# Altium PCB PCB1.PcbDoc
Units mil, origin at the board's own origin, x right, y up, seen from the top; angles counter-clockwise.
Board outline 6000 x 4000 mil, 2 copper layers (Top Layer, Bottom Layer); 69 components, 51 nets, 198 pads, 0 vias.
Unrouted connection lines stored in the file: 107.
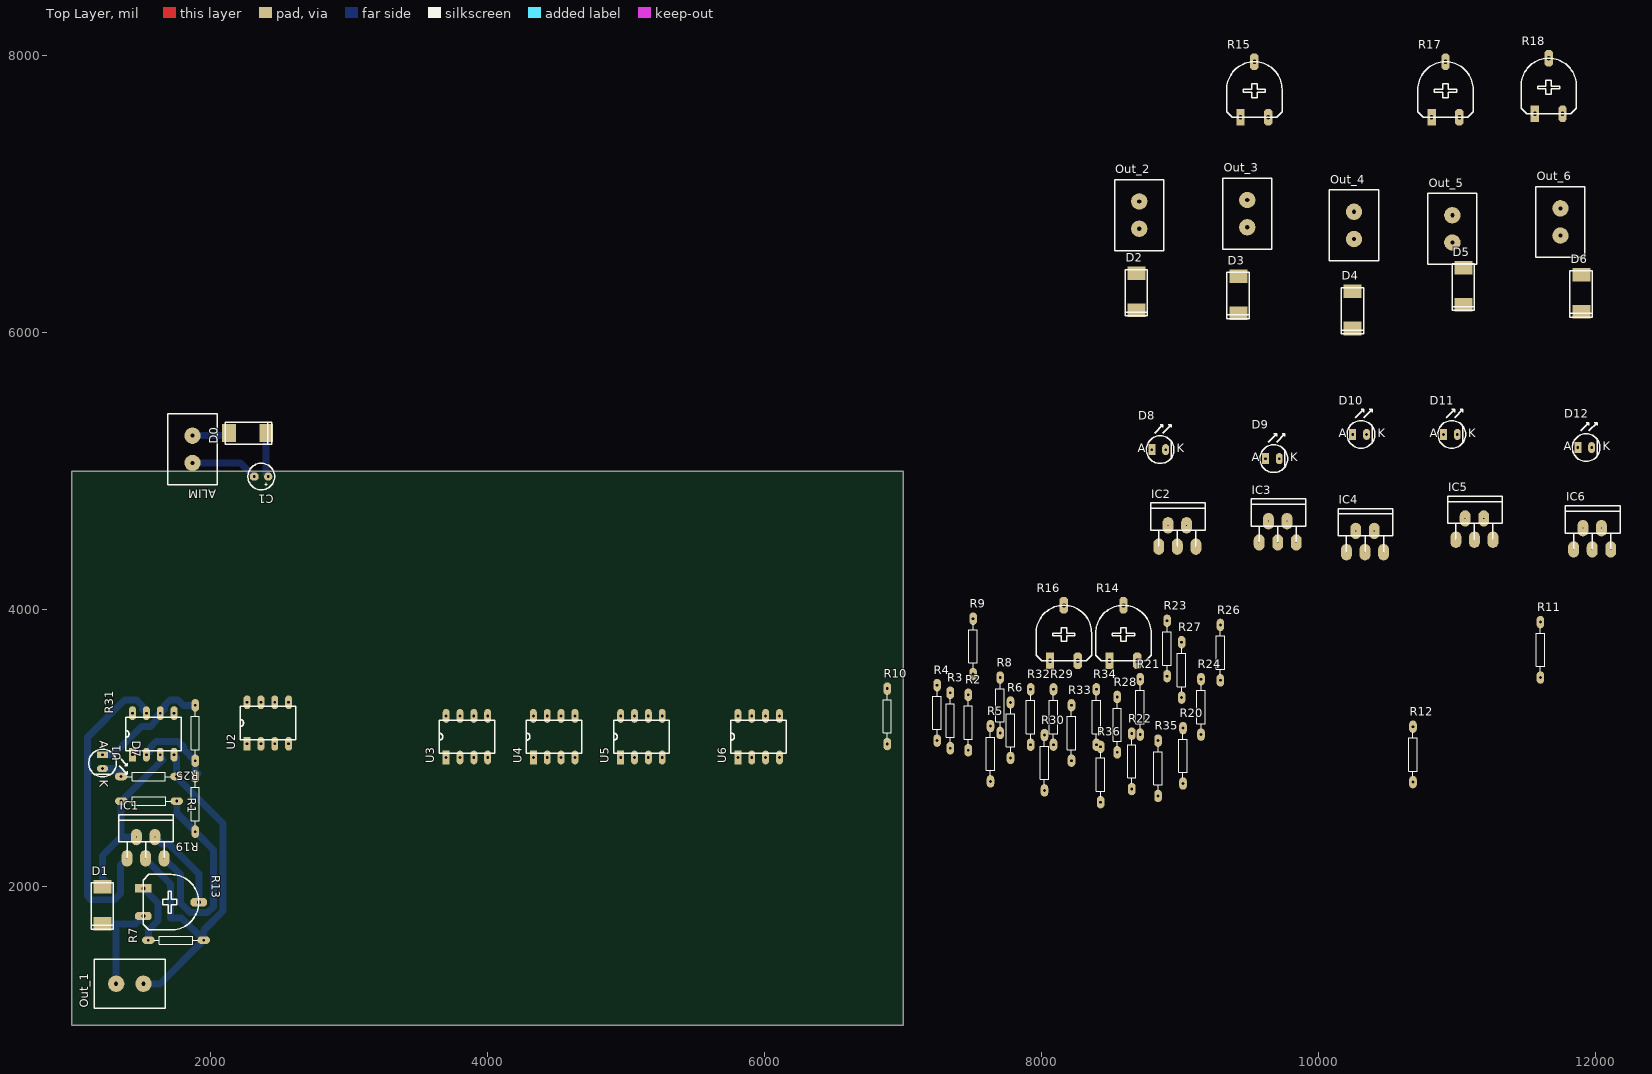
[diagram p0: Top Layer view]
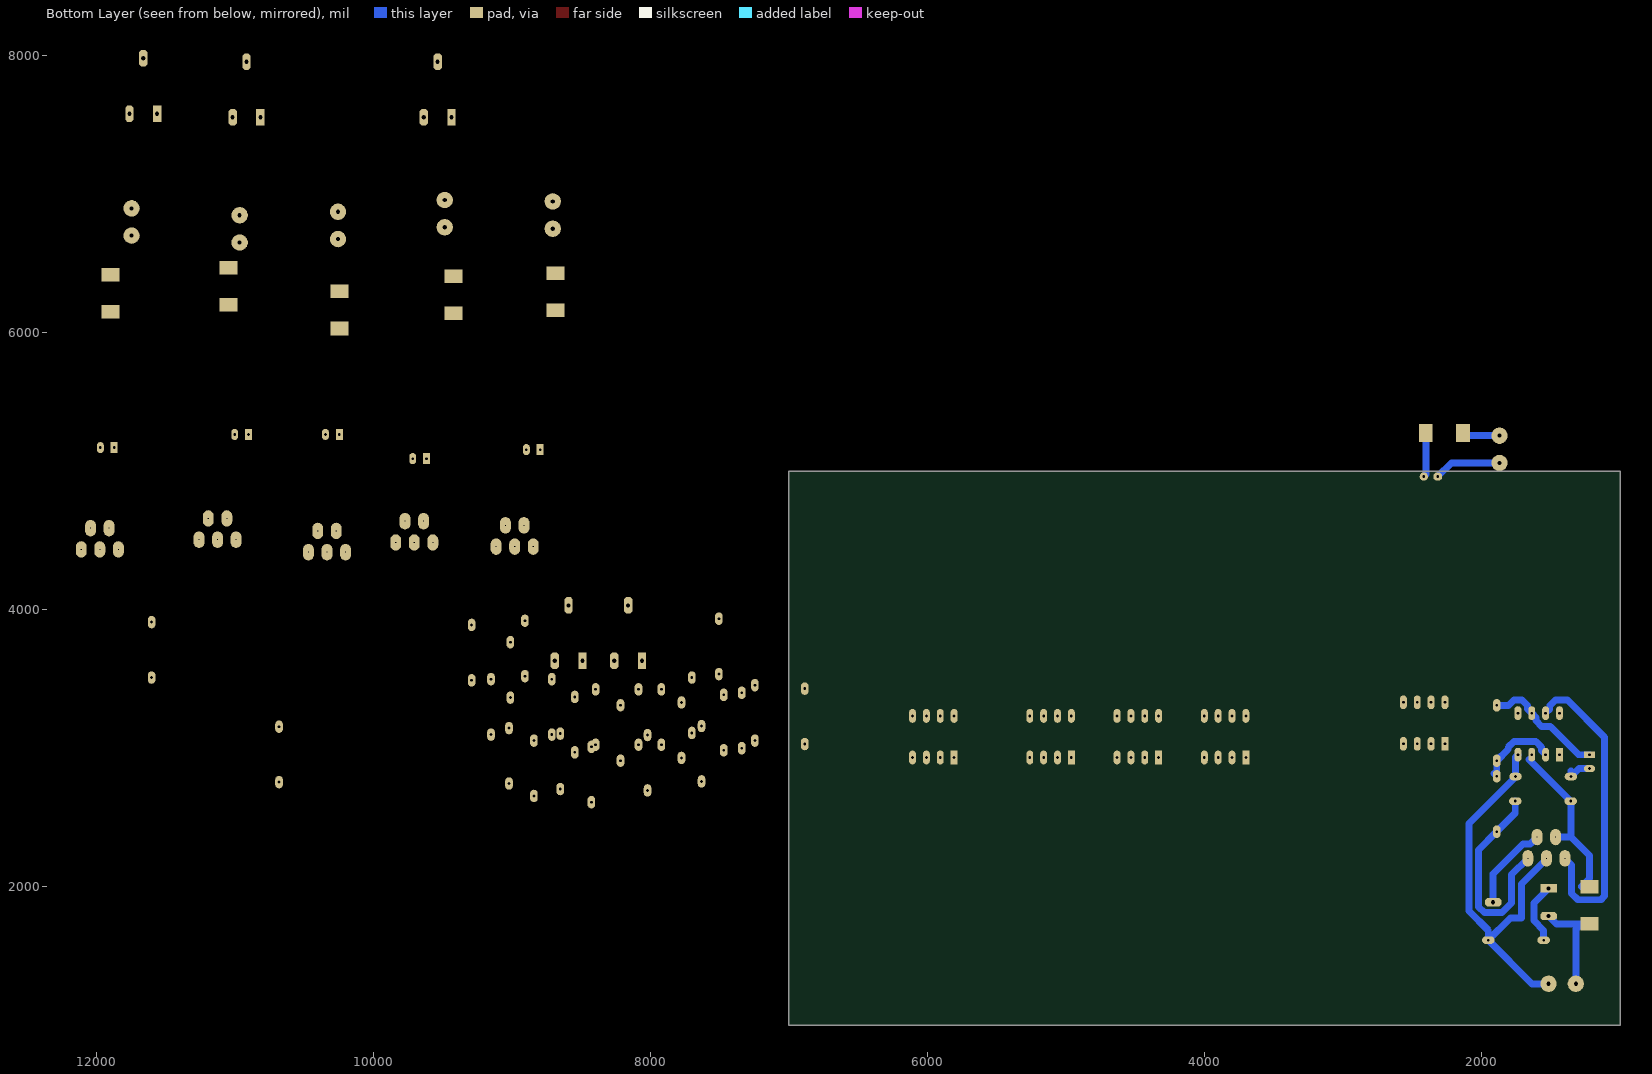
[diagram p1: Bottom Layer view, seen from below]

## Layer stack, top to bottom
Top Layer: signal copper 1.4
Dielectric: dielectric 12.6, FR-4, Dk 4.8
Bottom Layer: signal copper 1.4

## Board outline
1000,1000 7000,1000 7000,5000 1000,5000

## Design rules (kind name [scope] priority, off if disabled: settings)
Clearance [All] p1: gap=20
PolygonConnect [All] p1: connectstyle=Relief reliefconductorwidth=10 reliefentries=4 polygonreliefangle="90 Angle"
RoutingVias [All] p1: holewidth=28 width=50 viastyle="Through Hole" minholewidth=28 minwidth=50 maxholewidth=28 maxwidth=50
SilkscreenOverComponentPads [All] p1: minsilkscreentomaskgap=10
SolderMaskExpansion [All] p1: expansion=4
Width [All] p1: maxlimit=50 minlimit=50 preferedwidth=50
27 further rules are at their usual default settings.

## Components (designator, comment, footprint, x,y, rotation, side; value= is the part's Value field where it differs from the comment)
ALIM "Bornier" Bornier 1909.45,5255.91 r270 top
C1 "470uF" Capa_pol1 2421.26,4960.63 r180 top
D0 "Schottky B340" SMC 2401.57,5275.59 r180 top
D1 "Schottky B340" SMC 1220.47,1732.28 r90 top
D2 "Schottky B340" SMC 8685,6160 r90 top
D3 "Schottky B340" SMC 9420,6140 r90 top
D4 "Schottky B340" SMC 10245,6030 r90 top
D5 "Schottky B340" SMC 11045,6200 r90 top
D6 "Schottky B340" SMC 11895,6150 r90 top
D7 "Led" LED 1220.47,2952.76 r270 top
D8 "Led" LED 8795,5155 r0 top
D9 "Led" LED 9615,5090 r0 top
D10 "Led" LED 10245,5265 r0 top
D11 "Led" LED 10900,5265 r0 top
D12 "Led" LED 11870,5170 r0 top
IC1 "L200" Pentawatt 1397.64,2204.72 r0 top
IC2 "L200" Pentawatt 8845,4455 r0 top
IC3 "L200" Pentawatt 9570,4485 r0 top
IC4 "L200" Pentawatt 10200,4415 r0 top
IC5 "L200" Pentawatt 10990,4505 r0 top
IC6 "L200" Pentawatt 11840,4435 r0 top
Out_1 "Bornier" Bornier 1515.75,1259.84 r180 top
Out_2 "Bornier" Bornier 8665,6750 r90 top
Out_3 "Bornier" Bornier 9445,6760 r90 top
Out_4 "Bornier" Bornier 10215,6675 r90 top
Out_5 "Bornier" Bornier 10925,6650 r90 top
Out_6 "Bornier" Bornier 11705,6700 r90 top
R1 "2.2 ohm" "traversant 1/4W" 1496.06,2618.11 r0 top
R2 "2.2 ohm" "traversant 1/4W" 7470,3125 r90 top
R3 "2.2 ohm" "traversant 1/4W" 7340,3140 r90 top
R4 "2.2 ohm" "traversant 1/4W" 7245,3195 r90 top
R5 "2.2 ohm" "traversant 1/4W" 7630,2900 r90 top
R6 "2.2 ohm" "traversant 1/4W" 7775,3070 r90 top
R7 "1K" "traversant 1/4W" 1811.02,1614.17 r180 top
R8 "1K" "traversant 1/4W" 7700,3250 r90 top
R9 "1K" "traversant 1/4W" 7505,3675 r90 top
R10 "1K" "traversant 1/4W" 6885,3170 r90 top
R11 "1K" "traversant 1/4W" 11600,3650 r90 top
R12 "1K" "traversant 1/4W" 10680,2895 r90 top
R13 "RPot" AJUSTABLE 1515.75,1988.19 r270 top
R14 "RPot" AJUSTABLE 8490,3631 r0 top
R15 "RPot" AJUSTABLE 9435,7555 r0 top
R16 "RPot" AJUSTABLE 8060,3631 r0 top
R17 "RPot" AJUSTABLE 10815,7555 r0 top
R18 "RPot" AJUSTABLE 11560,7580 r0 top
R19 "1K" "traversant 1/4W" 1889.76,2657.48 r270 top
R20 "1K" "traversant 1/4W" 9020,2885 r90 top
R21 "1K" "traversant 1/4W" 8710.67,3238 r90 top
R22 "1K" "traversant 1/4W" 8650,2845 r90 top
R23 "1K" "traversant 1/4W" 8905,3660 r90 top
R24 "1K" "traversant 1/4W" 9150.04,3238 r90 top
R25 "10K" "traversant 1/4W" 1889.76,3169.29 r270 top
R26 "10K" "traversant 1/4W" 9290,3630 r90 top
R27 "10K" "traversant 1/4W" 9010,3505 r90 top
R28 "10K" "traversant 1/4W" 8545,3110 r90 top
R29 "10K" "traversant 1/4W" 8085,3165 r90 top
R30 "10K" "traversant 1/4W" 8020,2835 r90 top
R31 "1kohm" "traversant 1/4W" 1614.17,2795.28 r180 top
R32 "1kohm" "traversant 1/4W" 7920,3165 r90 top
R33 "1kohm" "traversant 1/4W" 8215,3050 r90 top
R34 "1kohm" "traversant 1/4W" 8395,3165 r90 top
R35 "1kohm" "traversant 1/4W" 8840,2795 r90 top
R36 "1kohm" "traversant 1/4W" 8425,2750 r90 top
U1 "TL081CN" DIP8 1437.01,2952.76 r90 top
U2 "TL081CN" DIP8 2263.78,3031.5 r90 top
U3 "TL081CN" DIP8 3700.79,2933.07 r90 top
U4 "TL081CN" DIP8 4330.71,2933.07 r90 top
U5 "TL081CN" DIP8 4960.63,2933.07 r90 top
U6 "TL081CN" DIP8 5807.09,2933.07 r90 top

## Footprints (in the part's own frame and the unit in brackets; to place one, negate y for a bottom-side part, rotate by r counter-clockwise, add the part's x,y. Pads: shape width x height; smd on the part's side, far side on the other; paste and mask are expansions set on the pad)
AJUSTABLE [mil]
  rect 60x120 hole 30: 1(0,0)
  oct 60x120 hole 30: 2(100,400) 3(200,0)
  silkscreen extent -100,0 300,400
Bornier [mm]
  round 3 hole 0.762: 1(0,-1) 2(5,-1)
  silkscreen extent -4,-5.5 9,3.5
Capa_pol1 [mil]
  round 60 hole 20: 1(5,0)
  oct 60x60 hole 20: 2(105,0)
  silkscreen extent -41,-96 151,96
DIP8 [mil]
  rect 100x50 hole 20: 1(0,0)
  oval 100x50 hole 20: 2(0,-100) 3(0,-200) 4(0,-300) 5(300,-300) 6(300,-200) 7(300,-100) 8(300,0)
  silkscreen extent 30,-350 270,50
LED [mil]
  rect 50x80 hole 20: 1(0,0)
  oval 50x80 hole 20: 2(100,0)
  silkscreen extent -40,-100 160,180
Pentawatt [mm]
  oval 2x3 hole 0.2: 1(0,0) 2(1.7,3.9) 3(3.4,0) 4(5.1,3.9) 5(6.8,0)
  silkscreen extent -1.5,0 8.5,8
SMC [mm]
  rect 2.5x3.3 all layers, no hole: 1(6.8,0) 2(0,0)
  silkscreen extent -1,-2 7.5,2.1
"traversant 1/4W" [mil]
  oval 90x55 hole 20: 1(-140,0) 2(260,0)
  silkscreen extent -99,-30 219,30

## Part data
ALIM Out_1 Out_2 Out_3 Out_4 Out_5 Out_6: library part Bornier2
C1: library part "Capa Pol"
D7 D8 D9 D10 D11 D12: "LED"
R1 R2 R3 R4 R5 R6 R7 R8 R9 R10 R11 R12 R19 R20 R21 R22 R23 R24 R25 R26 R27 R28 R29 R30 R31 R32 R33 R34 R35 R36: library part Resistance
R13 R14 R15 R16 R17 R18: "Potentiometer"
U1 U2 U3 U4 U5 U6: "General-Purpose J-FET Single Operational Amplifier"

## Nets (pads, with @x,y where several pads share a name; then routed paths per layer and width w, separated by ;. In a path a pad name is that pad's centre, name@x,y a point inside that pad or via, vN(x,y) a via of type N, cw(c..) or ccw(c..) an arc to the next point about the centre after c; other vN are vias at no path point)
GND: ALIM.2 C1.2 IC1.3 IC2.3 IC3.3 IC4.3 IC5.3 IC6.3 Out_1.1 Out_2.1 Out_3.1 Out_4.1 Out_5.1 Out_6.1 R7.1 R8.1 R9.1 R10.1 R11.1 R12.1 R31.1 R32.1 R33.1 R34.1 R35.1 R36.1 U1.4 U2.4 U3.4 U4.4 U5.4 U6.4 | length 3409.7
  Bottom Layer w50: Out_1.1 1636.06,1299.21 R7.1 ; IC1.3 1531.5,2199.58 1712.6,2018.48 1712.6,1773.86 1791.34,1773.86 R7.1 ; U1.4 1754.17,2935.59 R31.1 ; R31.1@1756.69,2797.8 R31.1 ; ALIM.2 2217.83,5059.06 C1.2 ; R31.1 1754.17,2792.83 2090.75,2456.25 2090.75,1825.55 1951.02,1685.83 R7.1
NetALIM_1: ALIM.1 D0.1 | length 271.9
  Bottom Layer w50: ALIM.1 2114.17,5255.91 D0.1
NetD1_1: D1.1 IC1.2 R1.1 U1.3 | length 1234.1
  Bottom Layer w50: D1.1@1279.53,2000 1220.47,2059.06 1220.47,2224.41 1354.33,2358.27 ; IC1.2 1354.33,2358.27 ; U1.3@1656.69,2918.74 R1.1 1354.33,2616.38 1354.33,2358.27
NetD1_2: D1.2 Out_1.2 R13.3 | length 708.8
  Bottom Layer w50: Out_1.2 1318.9,1692.91 1279.53,1732.28 1459.84,1732.28 R13.3
NetD2_1: D2.1 IC2.2 R2.1 U2.3
NetD2_2: D2.2 Out_2.2 R14.3
NetD3_1: D3.1 IC3.2 R3.1 U3.3
NetD3_2: D3.2 Out_3.2 R15.3
NetD4_1: D4.1 IC4.2 R4.1 U4.3
NetD4_2: D4.2 Out_4.2 R16.3
NetD5_1: D5.1 IC5.2 R5.1 U5.3
NetD5_2: D5.2 Out_5.2 R17.3
NetD6_1: D6.1 IC6.2 R6.1 U6.3
NetD6_2: D6.2 Out_6.2 R18.3
NetD7_1: D7.1 R25.1 U1.6 | length 876.9
  Bottom Layer w50: D7.1 1298.37,2952.76 1503.37,3157.76 1566,3157.76 1607.01,3198.76 1607.01,3222.76 U1.6 1667.01,3282.76 1667.01,3306.75 1708.01,3347.76 1766,3347.76 1804.47,3309.29 R25.1
NetD7_2: D7.2 R31.2 | length 199.4
  Bottom Layer w50: D7.2 1296.69,2852.76 R31.2 1354.17,2837.17
NetD8_1: D8.1 R26.1 U2.6
NetD8_2: D8.2 R32.2
NetD9_1: D9.1 R27.1 U3.6
NetD9_2: D9.2 R33.2
NetD10_1: D10.1 R28.1 U4.6
NetD10_2: D10.2 R34.2
NetD11_1: D11.1 R29.1 U5.6
NetD11_2: D11.2 R35.2
NetD12_1: D12.1 R30.1 U6.6
NetD12_2: D12.2 R36.2
NetIC1_4: IC1.4 R13.2 | length 632.2
  Bottom Layer w50: IC1.4 1647.91,2308.78 1700.3,2308.78 1915.75,2093.33 R13.2
NetIC1_5: IC1.5 R1.2 R19.2 | length 1527.9
  Bottom Layer w50: IC1.5 1782.6,2087.48 1782.6,1882.7 1852.11,1813.19 1979.39,1813.19 2020.75,1854.55 2020.75,2266.5 R19.2 1756.06,2531.18 R1.2
NetIC2_4: IC2.4 R14.2
NetIC2_5: IC2.5 R2.2 R20.2
NetIC3_4: IC3.4 R15.2
NetIC3_5: IC3.5 R3.2 R21.2
NetIC4_4: IC4.4 R16.2
NetIC4_5: IC4.5 R4.2 R22.2
NetIC5_4: IC5.4 R17.2
NetIC5_5: IC5.5 R5.2 R23.2
NetIC6_4: IC6.4 R18.2
NetIC6_5: IC6.5 R6.2 R24.2
NetR7_2: R7.2 R13.1 | length 446.4
  Bottom Layer w50: R13.1 1620.75,1883.19 1620.75,1754.55 1551.02,1684.83 R7.2
NetR8_2: R8.2 R14.1
NetR9_2: R9.2 R15.1
NetR10_2: R10.2 R16.1
NetR11_2: R11.2 R17.1
NetR12_2: R12.2 R18.1
NetR19_1: R19.1 R25.2 U1.2 | length 611.8
  Bottom Layer w50: U1.2 1567.01,2982.76 1567.01,3006.75 1608.01,3047.76 1766,3047.76 1807.01,3006.75 1807.01,2992.05 R25.2 R19.1 R19.1@1909.45,2817.17
NetR20_1: R20.1 R26.2 U2.2
NetR21_1: R21.1 R27.2 U3.2
NetR22_1: R22.1 R28.2 U4.2
NetR23_1: R23.1 R29.2 U5.2
NetR24_1: R24.1 R30.2 U6.2
VCC: C1.1 D0.2 IC1.1 IC2.1 IC3.1 IC4.1 IC5.1 IC6.1 U1.7 U2.7 U3.7 U4.7 U5.7 U6.7 | length 2601.3
  Bottom Layer w50: IC1.1 1349.53,2156.61 1349.53,1951.24 1304.07,1905.79 1136.87,1905.79 1110.51,1932.15 1110.51,3079.02 1379.25,3347.76 1466,3347.76 1507.01,3306.75 1507.01,3282.76 U1.7 ; D0.2 2401.57,4975.31 C1.1
pads on no net: U1.1 U1.5 U1.8 U2.1 U2.5 U2.8 U3.1 U3.5 U3.8 U4.1 U4.5 U4.8 U5.1 U5.5 U5.8 U6.1 U6.5 U6.8

## Text inside footprints (layer, text, board x,y; h text height)
D7: Top Overlay "A" at 1200.47,3052.76 h60 r270; Top Overlay "K" at 1200.47,2772.76 h60 r270
D8: Top Overlay "A" at 8695,5135 h60; Top Overlay "K" at 8975,5135 h60
D9: Top Overlay "A" at 9515,5070 h60; Top Overlay "K" at 9795,5070 h60
D10: Top Overlay "A" at 10145,5245 h60; Top Overlay "K" at 10425,5245 h60
D11: Top Overlay "A" at 10800,5245 h60; Top Overlay "K" at 11080,5245 h60
D12: Top Overlay "A" at 11770,5150 h60; Top Overlay "K" at 12050,5150 h60